# Altium PCB PCB_led_heart.PcbDoc
Units mil, origin at the board's own origin, x right, y up, seen from the top; angles counter-clockwise.
Board outline 6000 x 4000 mil, 2 copper layers (Top Layer, Bottom Layer); 47 components, 31 nets, 124 pads, 0 vias.
Unrouted connection lines stored in the file: 63.
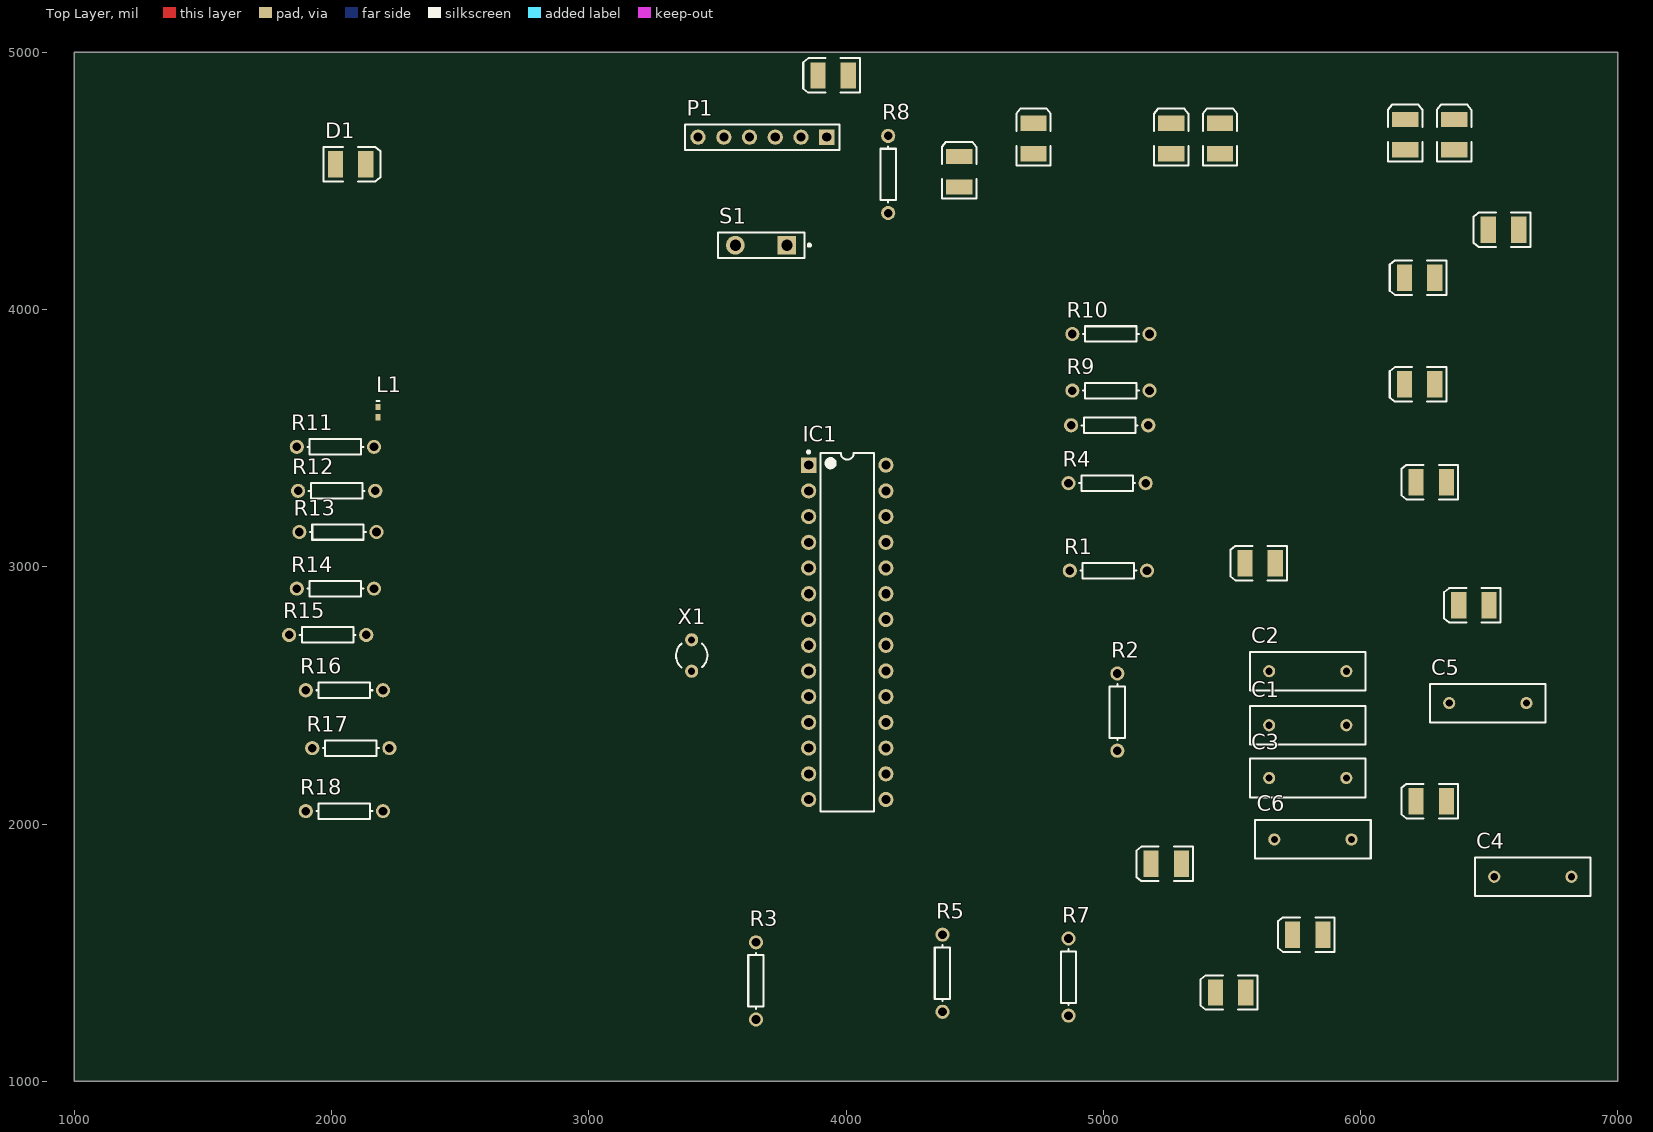
[diagram p0: Top Layer view]
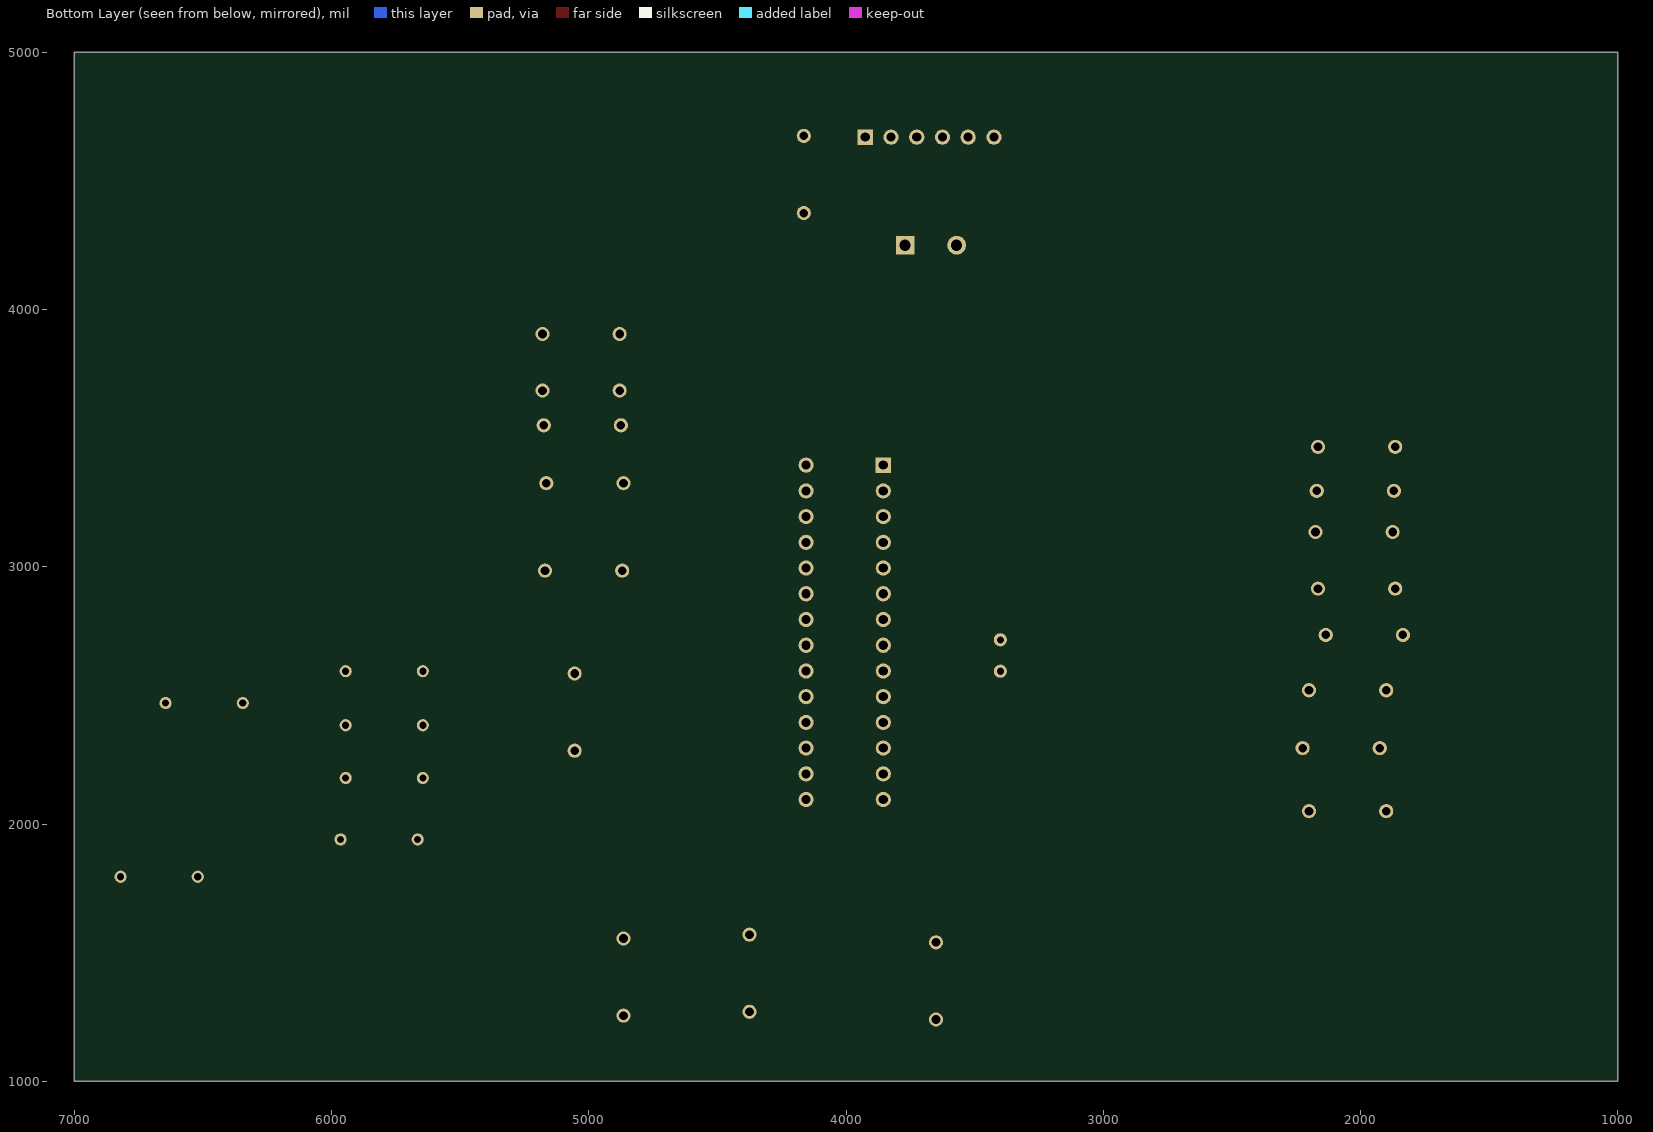
[diagram p1: Bottom Layer view, seen from below]

## Layer stack, top to bottom
Top Solder: solder mask 0.4, Solder Resist, Dk 3.5
Top Layer: signal copper 1.4
Dielectric 1: dielectric 12.6, FR-4, Dk 4.8
Bottom Layer: signal copper 1.4
Bottom Solder: solder mask 0.4, Solder Resist, Dk 3.5

## Board outline
1000,1000 7000,1000 7000,5000 1000,5000

## Design rules (kind name [scope] priority, off if disabled: settings)
Clearance [All] p1: gap=10 ignorepadtopadclearanceinfootprint=FALSE except(0: Arc-Hole Track-Hole SMDPad-Hole THPad-Hole Via-Hole Fill-Hole Poly-Hole Region-Hole Text-Hole)
PolygonConnect [All] p1: connectstyle=Relief reliefconductorwidth=10 reliefentries=4 polygonreliefangle="90 Angle" airgapwidth=10
RoutingVias [All] p1: holewidth=28 width=50 viastyle="Through Hole" minholewidth=28 minwidth=50 maxholewidth=28 maxwidth=50
SolderMaskExpansion [All] p1: expansion=4 istentingtop=FALSE
Width [All] p1: maxlimit=19.68 minlimit=10 preferedwidth=11.81
30 further rules are at their usual default settings.

## Components (designator, comment, footprint, x,y, rotation, side; value= is the part's Value field where it differs from the comment)
C1 "Cap" RAD-0.3 5795,2383.94 r180 top value=22pF
C2 "Cap" RAD-0.3 5795,2593.94 r180 top value=100nF
C3 "Cap" RAD-0.3 5795,2178.94 r180 top value=22pF
C4 "Cap" RAD-0.3 6670,1795 r180 top value=100nF
C5 "Cap" RAD-0.3 6495,2470 r180 top value=100nF
C6 "Cap" RAD-0.3 5815,1940 r0 top value=100nF
D1 "" 3.5X2.8X1.9 2073.94,4565 r0 top
IC1 "ATmega8L-8PI" 28P3 4005,2745 r0 top
L1 "" 0402-A 2180,3601.06 r270 top value=10mH
P1 "Header 6" HDR1X6 3925,4670 r180 top
R1 "Res1" AXIAL-0.3 5020,2985 r180 top value=1K
R2 "Res1" AXIAL-0.3 5055,2435 r270 top value=10K
R3 "" AXIAL-0.3 3650,1390 r90 top value=1K
R4 "Res1" AXIAL-0.3 5015,3325 r180 top value=1K
R5 "" AXIAL-0.3 4375,1420 r90 top value=1K
R6 "Res1" AXIAL-0.3 5025,3550 r0 top value=1K
R7 "" AXIAL-0.3 4865,1405 r90 top value=1K
R8 "Res1" AXIAL-0.3 4163.94,4525 r90 top value=1K
R9 "Res1" AXIAL-0.3 5030,3685 r0 top value=1K
R10 "Res1" AXIAL-0.3 5030,3905 r0 top value=1K
R11 "" AXIAL-0.3 2015,3466.06 r0 top value=1K
R12 "" AXIAL-0.3 2020,3295 r0 top value=1K
R13 "" AXIAL-0.3 2025,3135 r180 top value=1K
R14 "" AXIAL-0.3 2015,2915 r180 top value=1K
R15 "" AXIAL-0.3 1985,2735 r180 top value=1K
R16 "" AXIAL-0.3 2050,2520 r180 top value=1K
R17 "" AXIAL-0.3 2075,2295 r180 top value=1K
R18 "" AXIAL-0.3 2050,2050 r180 top value=1K
S1 "SW-PB" SPST-2 3670,4250 r180 top
X1 "XTAL" R38 3400,2655 r180 top
? "LED11" 3.5X2.8X1.9 6275,3328.94 r180 top
? "LED17" 3.5X2.8X1.9 5245,1845 r180 top
? "LED10" 3.5X2.8X1.9 6230,3708.94 r180 top
? "LED4" 3.5X2.8X1.9 5453.94,4665 r90 top
? "LED3" 3.5X2.8X1.9 6363.94,4680 r90 top
? "LED8" 3.5X2.8X1.9 6555.94,4310 r180 top
? "LED13" 3.5X2.8X1.9 6275,2088.94 r180 top
? "LED12" 3.5X2.8X1.9 6440.94,2850 r180 top
? "LED1" 3.5X2.8X1.9 3950,4910 r180 top
? "LED7" 3.5X2.8X1.9 4728.94,4665 r90 top
? "LED2" 3.5X2.8X1.9 6173.94,4680 r90 top
? "LED14" 3.5X2.8X1.9 5795,1570 r180 top
? "LED5" 3.5X2.8X1.9 5263.94,4665 r90 top
? "LED9" 3.5X2.8X1.9 6230,4123.94 r180 top
? "LED15" 3.5X2.8X1.9 5610,3013.94 r180 top
? "LED6" 3.5X2.8X1.9 4440,4535.94 r90 top
? "LED16" 3.5X2.8X1.9 5495,1345 r180 top

## Footprints (in the part's own frame and the unit in brackets; to place one, negate y for a bottom-side part, rotate by r counter-clockwise, add the part's x,y. Pads: shape width x height; smd on the part's side, far side on the other; paste and mask are expansions set on the pad)
3.5X2.8X1.9 [mm] "SM LED; 2 C-Bend Leads; Body 3.5 x 2.8 x 1.9 mm, inc leads (LxWxH typ)"
  rect 1.5x2.6 smd: 1(-1.5,0) 2(1.5,0)
  silkscreen extent -2.65,-1.7 2.95,1.7
28P3 [mm] "DIP, 28-Leads, Row Spacing 7.62mm, Pitch 2.54mm, Body 34.67x7.3mm"
  rect 1.5x1.5 hole 0.9: 1(-3.81,16.51)
  round 1.5 hole 0.9: 2(-3.81,13.97) 3(-3.81,11.43) 4(-3.81,8.89) 5(-3.81,6.35) 6(-3.81,3.81) 7(-3.81,1.27) 8(-3.81,-1.27) 9(-3.81,-3.81) 10(-3.81,-6.35) 11(-3.81,-8.89) 12(-3.81,-11.43) 13(-3.81,-13.97) 14(-3.81,-16.51) 15(3.81,-16.51) 16(3.81,-13.97) 17(3.81,-11.43) 18(3.81,-8.89) 19(3.81,-6.35) 20(3.81,-3.81) 21(3.81,-1.27) 22(3.81,1.27) 23(3.81,3.81) 24(3.81,6.35) 25(3.81,8.89) 26(3.81,11.43) 27(3.81,13.97) 28(3.81,16.51)
  silkscreen extent -3.93,-17.7 2.65,17.93, body extent -3.6,-17.65 3.6,17.65, height 4.58
0402-A [mm] "Chip Inductor, Body 1.0x0.5mm, IPC High Density"
  rect 0.6x0.5 smd: 1(-0.5,0) 2(0.5,0)
  silkscreen extent -1.1,-0.15 -1.1,0.15, body extent -0.55,-0.3 0.55,0.3, height 0.55
AXIAL-0.3 [mm] "Axial Device, Thru-Hole; 2 Leads; 0.3 in Pin Spacing"
  round 1.4 hole 0.85: 1(-3.81,0) 2(3.81,0)
  silkscreen extent -2.77,-0.76 2.77,0.76
HDR1X6 [mm] "Connector; Header; 6 Position"
  rect 1.5x1.5 hole 0.9: 1(0,0)
  round 1.5 hole 0.9: 2(2.54,0) 3(5.08,0) 4(7.62,0) 5(10.16,0) 6(12.7,0)
  silkscreen extent -1.27,-1.27 13.97,1.27
R38 [mm] "Crystal, Thru-Hole; 2 Leads; Body 3.1 x 8.2 mm (Dia.xH)"
  round 1.3 hole 0.7: 1(0,1.55) 2(0,-1.55)
  silkscreen extent -1.55,-1.19 1.55,1.17
RAD-0.3 [mm] "Radial Cap, Thru-Hole; 2 Leads; 0.3 in Pin Spacing"
  round 1.2 hole 0.7: 1(-3.81,0) 2(3.81,0)
  silkscreen extent -5.71,-1.91 5.71,1.91
SPST-2 [mm] "Switch; 2 Leads"
  rect 1.85x1.85 hole 1.1: 1(-2.54,0)
  round 1.85 hole 1.1: 2(2.54,0)
  silkscreen extent -4.89,-1.27 4.28,1.27

## Part data
C1 C2 C3 C4 C5 C6: "Capacitor", LatestRevisionDate=17-Jul-2002, LatestRevisionNote="Re-released for DXP Platform.", PackageDescription="Radial Cap, Thru-Hole; 2 Leads; 0.3 in Pin Spacing", PackageReference=RAD-0.3, Published=8-Jun-2000, Publisher="Altium Limited"
D1 ? ? ? ? ? ? ? ? ? ? ? ? ? ? ? ?: library part LED3, "Typical BLUE SiC LED", DatasheetVersion=16-Apr-2002, LatestRevisionDate=17-Dec-2003, LatestRevisionNote="PCB Footprint replaced.", PackageDescription="SM LED; 2 C-Bend Leads; Body 3.5 x 2.8 x 1.9 mm, inc leads (LxWxH typ)", PackageReference=3.5X2.8X1.9, PackageVersion=16-Apr-2002, Published=8-Jun-2000, Publisher="Altium Limited"
IC1: "8-Bit AVR Microcontroller with 8K Bytes of In-System Programmable Flash Memory", Supplier Part Number 1=ATMEGA8L-8PI-ND, ComponentLink1Description=Datasheet, ComponentLink1URL=http://www.atmel.com/dyn/resources/prod_documents/doc2486.pdf, ComponentLink2Description="Atmel.com Home", ComponentLink2URL=http://www.atmel.com, DatasheetVersion=2486H-AVR-09/02, PackageDescription="28-lead (0.300\"/7.62mm Wide) Plastic Dual Inline Package (PDIP)", PackageReference=28P3, PackageVersion="revB, Sep-2001", Published=17-Sep-2003, Publisher="Altium Limited", Supplier 1=Digi-Key, Supplier 2=Farnell, Supplier 3=Mouser, Supplier Part Number 2=3917940, Supplier Part Number 3=556-ATMEGA8L-8PI
L1: library part Inductor, Code_IEC=1005, Code_JEITA=0402, LatestRevisionDate=29-May-2009, LatestRevisionNote="IPC-7351 Footprint Added.", PackageDescription="Chip Inductor", PackageReference=0402-A, Published=8-Jun-2000, Publisher="Altium Limited"
P1: "Header, 6-Pin", LatestRevisionDate=17-Jul-2002, LatestRevisionNote="Re-released for DXP Platform.", Publisher="Altium Limited"
R1 R2 R4 R6 R8 R9 R10: "Resistor", LatestRevisionDate=17-Jul-2002, LatestRevisionNote="Re-released for DXP Platform.", PackageDescription="Axial Device, Thru-Hole; 2 Leads; 0.3 in Pin Spacing", PackageReference=AXIAL-0.3, Published=8-Jun-2000, Publisher="Altium Limited"
R3 R5 R7 R11 R12 R13 R14 R15 R16 R17 R18: library part Res1, "Resistor", LatestRevisionDate=17-Jul-2002, LatestRevisionNote="Re-released for DXP Platform.", PackageDescription="Axial Device, Thru-Hole; 2 Leads; 0.3 in Pin Spacing", PackageReference=AXIAL-0.3, Published=8-Jun-2000, Publisher="Altium Limited"
S1: "Switch", LatestRevisionDate=17-Jul-2002, LatestRevisionNote="Re-released for DXP Platform.", PackageDescription="Switch; 2 Leads", PackageReference=SPST-2, Published=24-Mar-1999, Publisher="Altium Limited"
X1: "Crystal Oscillator", LatestRevisionDate=17-Jul-2002, LatestRevisionNote="Re-released for DXP Platform.", PackageDescription="Crystal, Thru-Hole; 2 Leads; Body 3.1 x 8.2 mm (Dia.xH)", PackageReference=R38, Published=8-Jun-2000, Publisher="Altium Limited"
?: "Typical BLUE SiC LED", DatasheetVersion=16-Apr-2002, LatestRevisionDate=17-Dec-2003, LatestRevisionNote="PCB Footprint replaced.", PackageDescription="SM LED; 2 C-Bend Leads; Body 3.5 x 2.8 x 1.9 mm, inc leads (LxWxH typ)", PackageReference=3.5X2.8X1.9, PackageVersion=16-Apr-2002, Published=8-Jun-2000, Publisher="Altium Limited"

## Nets (pads, with @x,y where several pads share a name; then routed paths per layer and width w, separated by ;. In a path a pad name is that pad's centre, name@x,y a point inside that pad or via, vN(x,y) a via of type N, cw(c..) or ccw(c..) an arc to the next point about the centre after c; other vN are vias at no path point)
+5: C6.1 D1.2 IC1.7 L1.2 P1.1 R2.2
/RES: C2.2 IC1.1 P1.6 R2.1 S1.2
GND: ?.2 C1.1 C2.1 C3.1 C4.1 C5.1 C6.2 IC1.8 IC1.22 P1.2 S1.1
Net_1: ?.1@5554.06,1345 R17.1
NetB1_1: D1.1
NetB1_2: 
NetB2_2: 
NetC4_2: C4.2 IC1.20 L1.1
NetC5_2: C5.2 IC1.21
NetIC1_2: IC1.2 R11.2
NetIC1_3: IC1.3 R12.2
NetIC1_4: IC1.4 R13.2
NetIC1_5: IC1.5 R14.2
NetIC1_6: IC1.6 R15.2
NetIC1_11: IC1.11 R16.2
NetIC1_12: IC1.12 R17.2
NetIC1_13: IC1.13 R18.2
NetIC1_14: IC1.14 R3.2
NetIC1_15: IC1.15 R5.2
NetIC1_16: IC1.16 R7.2
NetIC1_23: IC1.23 R1.1
NetIC1_24: IC1.24 R4.1
NetIC1_25: IC1.25 R6.1
NetIC1_26: IC1.26 R8.1
NetIC1_27: IC1.27 R9.1
NetIC1_28: IC1.28 R10.1
"PB3 (MOSI)": IC1.17 P1.3
"PB4 (MISO)": IC1.18 P1.5
"PB5 (SCK)": IC1.19 P1.4
XTAL1: C1.2 IC1.9 X1.2
XTAL2: C3.2 IC1.10 X1.1
pads on no net: ?.1@4009.06,4910 ?.1@4440,4476.89 ?.1@4728.94,4605.94 ?.1@5263.94,4605.94 ?.1@5304.06,1845 ?.1@5453.94,4605.94 ?.1@5669.06,3013.94 ?.1@5854.06,1570 ?.1@6173.94,4620.94 ?.1@6289.06,3708.94 ?.1@6289.06,4123.94 ?.1@6334.06,2088.94 ?.1@6334.06,3328.94 ?.1@6363.94,4620.94 ?.1@6500,2850 ?.1@6615,4310 R1.2 R3.1 R4.2 R5.1 R6.2 R7.1 R8.2 R9.2 R10.2 R11.1 R12.1 R13.1 R14.1 R15.1 R16.1 R18.1